# Altium PCB UWB_V1.PcbDoc
Units mm, origin at the board's own origin, x right, y up, seen from the top; angles counter-clockwise.
Board outline 45.34 x 49.88 mm, 2 copper layers (Top Layer, Bottom Layer); 57 components, 49 nets, 251 pads, 107 vias.
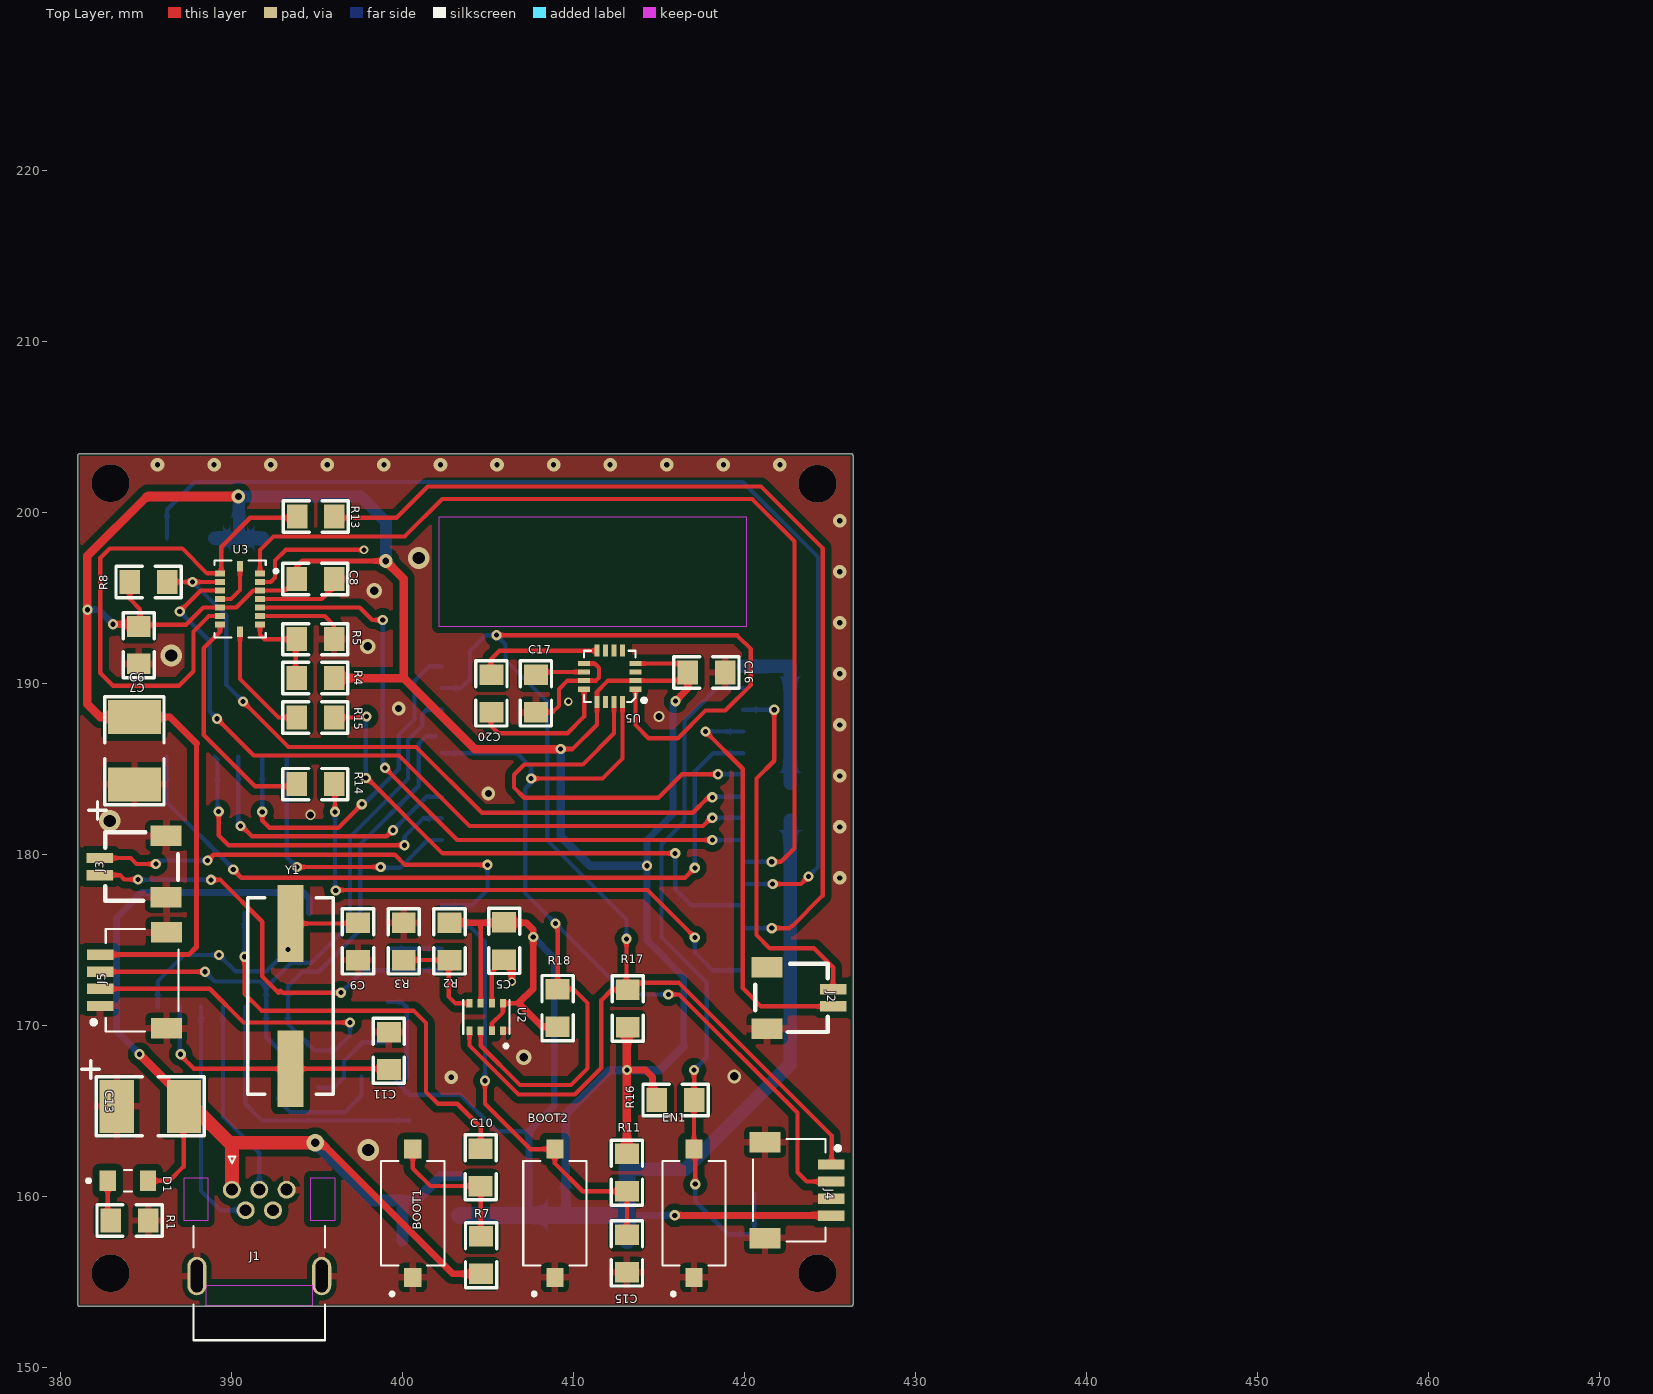
[diagram p0: Top Layer view]
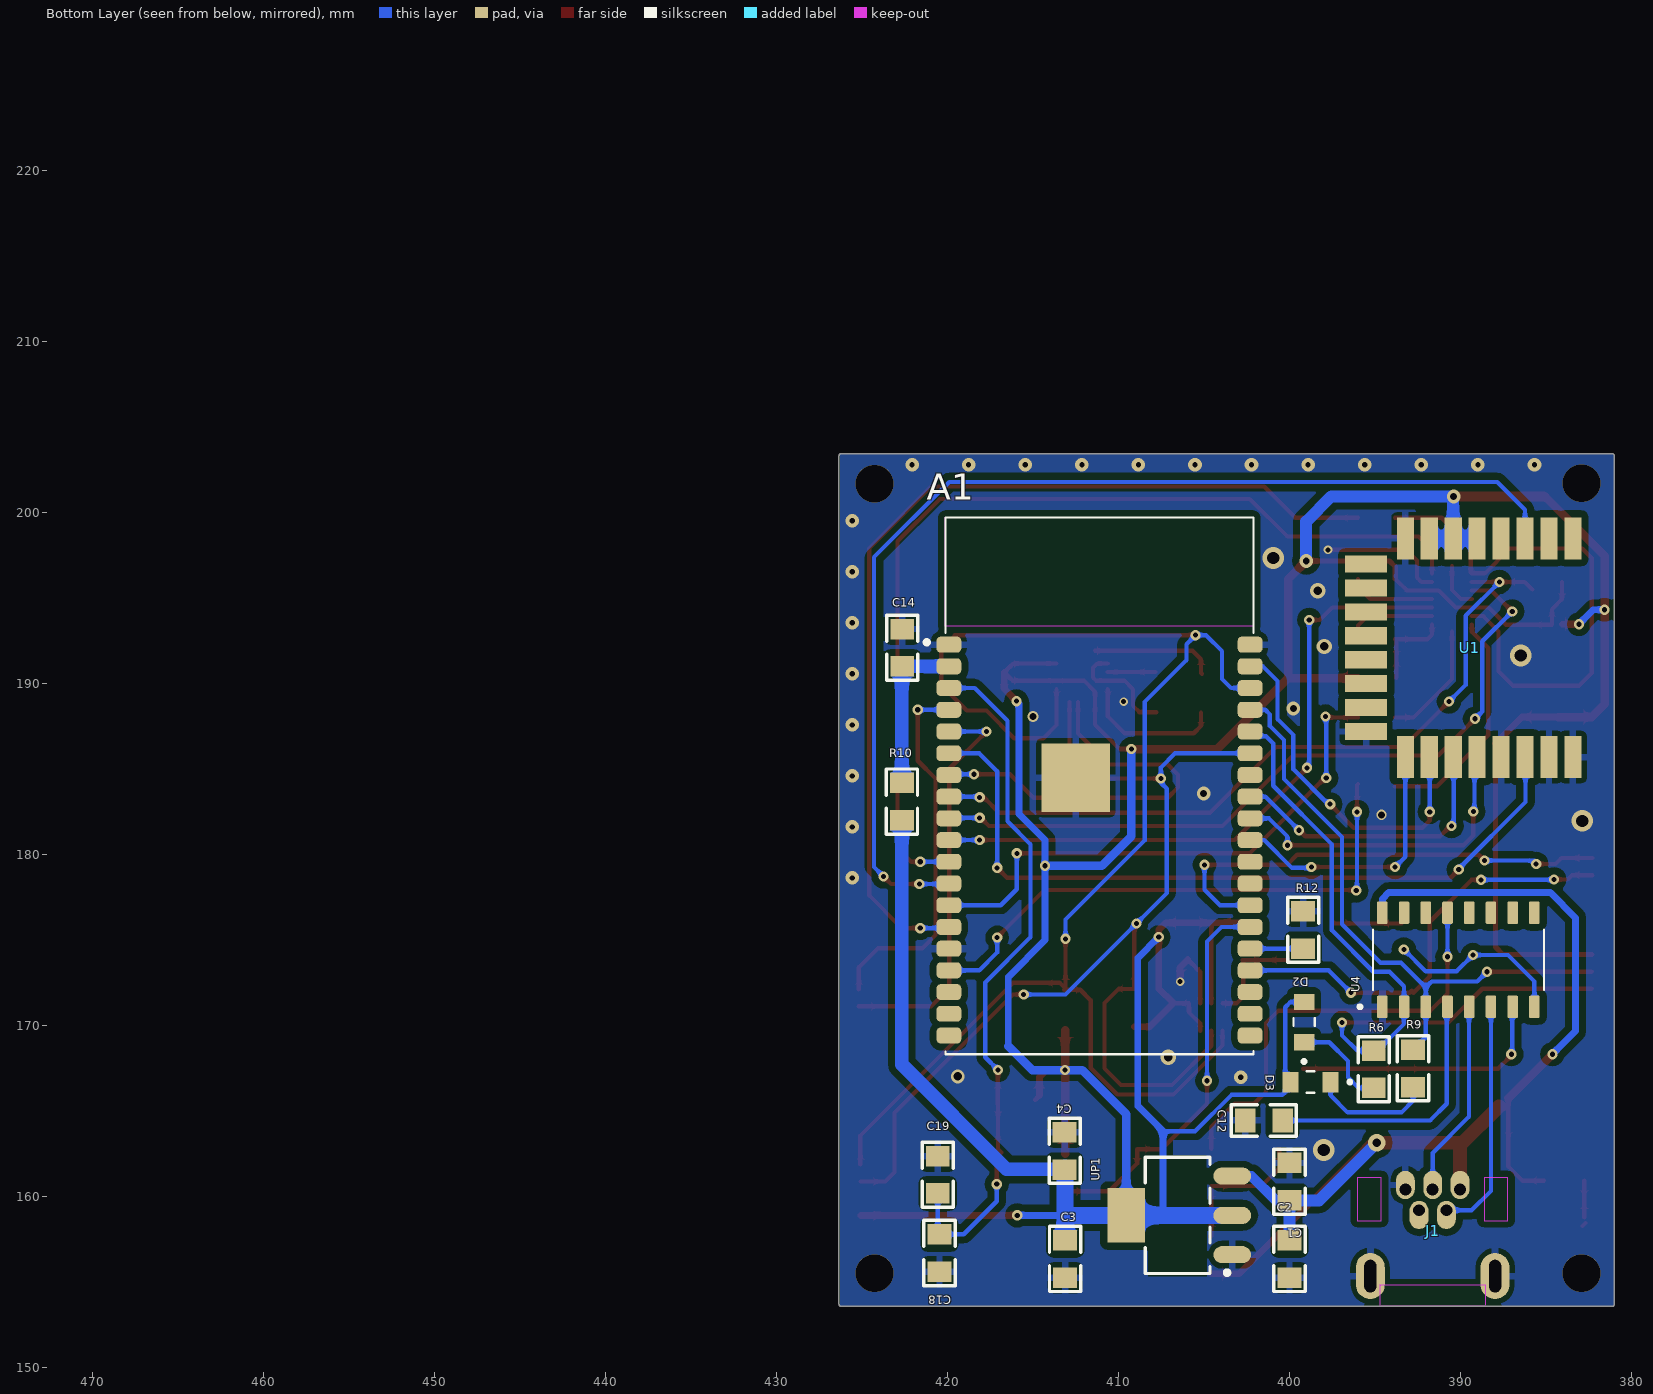
[diagram p1: Bottom Layer view, seen from below]
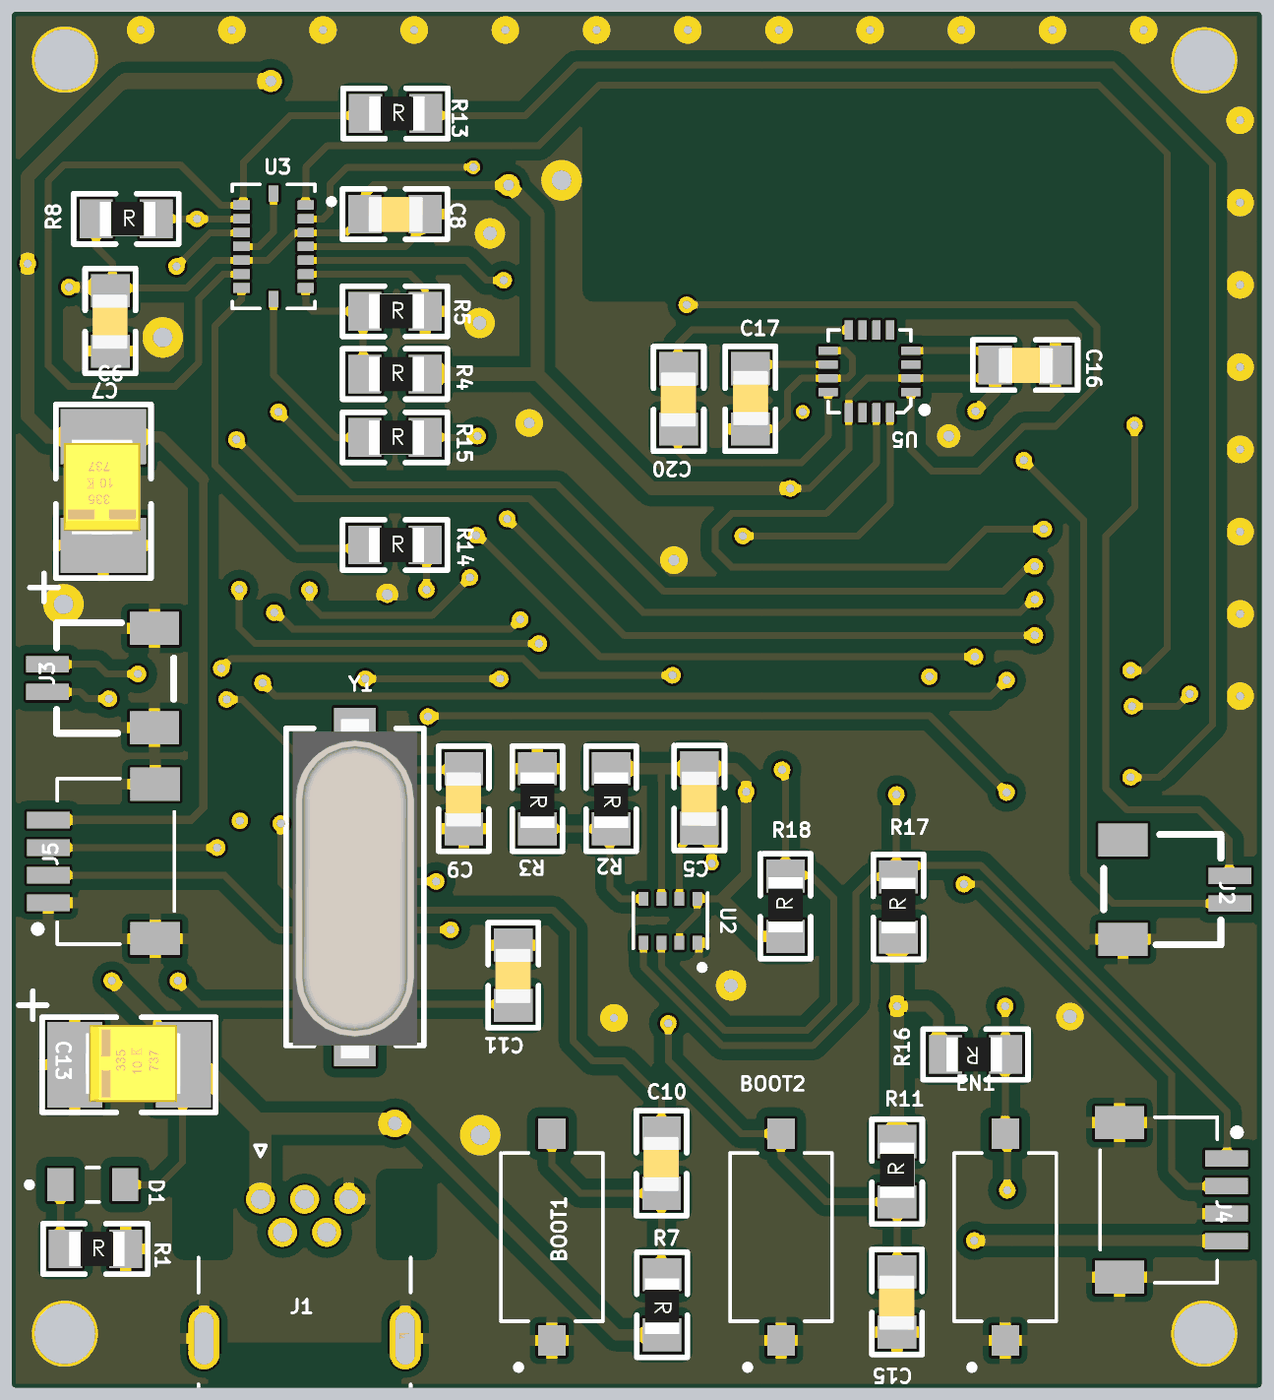
[diagram p2: 3D render of the assembled board from above, using the file's embedded part models]
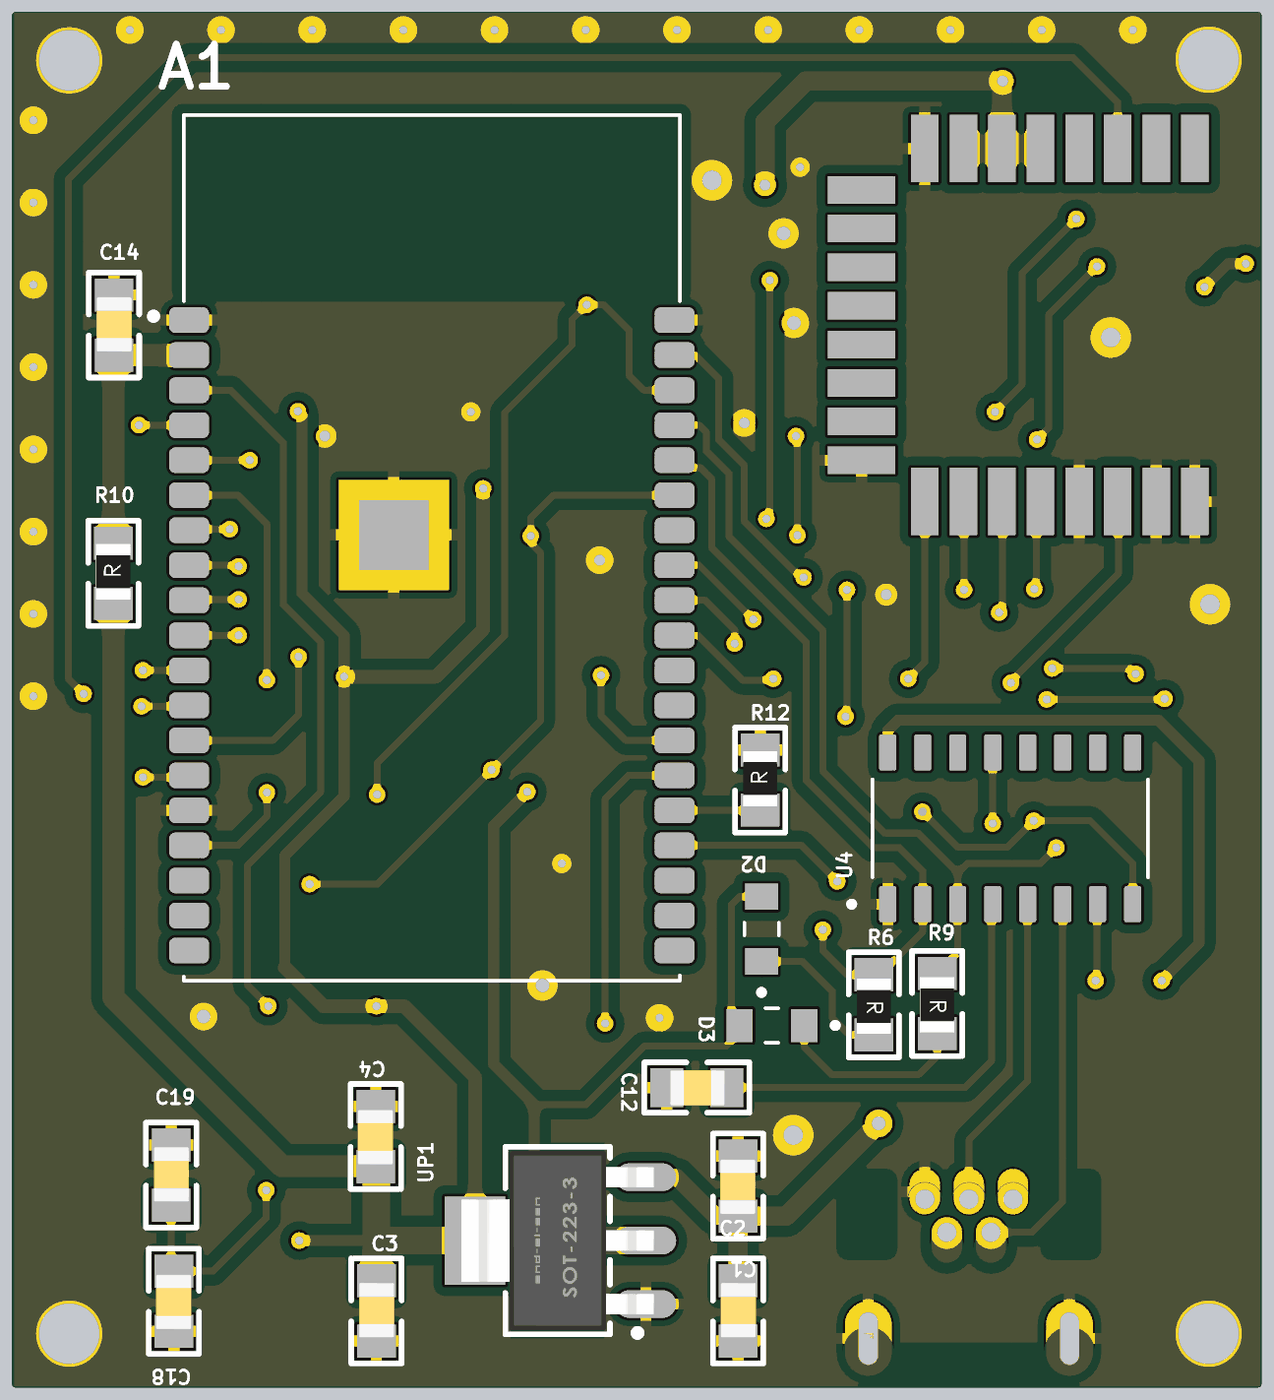
[diagram p3: 3D render of the assembled board from below, using the file's embedded part models]

## Layer stack, top to bottom
Top Solder: solder mask 0.0102, Solder Resist, Dk 3.5
Top Layer: signal copper 0.0356
Dielectric 1: dielectric 0.32, FR-4, Dk 4.8
Bottom Layer: signal copper 0.0356
Bottom Solder: solder mask 0.0102, Solder Resist, Dk 3.5

## Board outline
381.006,153.7 ccw(c381.132,153.7) 381.132,153.575 426.225,153.575 ccw(c426.225,153.7) 426.35,153.7 426.35,203.325 ccw(c426.225,203.325) 426.225,203.45 381.132,203.45 ccw(c381.132,203.325) 381.006,203.325

## Design rules (kind name [scope] priority, off if disabled: settings)
Clearance Clearance_polygon [InPolygon] p1: gap=0.4 ignorepadtopadclearanceinfootprint=FALSE
Clearance Clearance_all [All] p2: gap=0.2 ignorepadtopadclearanceinfootprint=FALSE
ComponentClearance [All] p1: gap=0.1 collisioncheckmode=3 verticalgap=0.1 showdistances=FALSE
FabricationTestPointUsage TestPointUsage [All] p1: valid=0 allowmultiple=FALSE
FabricationTestpoint Testpoint [All] p1: side=3 testpointundercomponent=TRUE minsize=1.016 maxsize=2.54 preferedsize=1.524 minholesize=0 maxholesize=1.016 preferedholesize=0.813 testpointgrid=0.025 allowsidetop=TRUE allowsidebottom=TRUE usegrid=TRUE gridtolerance=0
Height [All] p1: minheight=0 maxheight=100 prefheight=100
HoleSize [All] p1: absolutevalues=TRUE maxlimit=10 minlimit=0.3 maxpercent=80.000 minpercent=20.000
HoleToHoleClearance [All] p1: gap=0.3 allowstackedmicrovias=TRUE
MinimumSolderMaskSliver [All] p1: minsoldermaskwidth=0.1
PlaneClearance [All] p1: clearance=0.2
PlaneConnect [All] p1: planeconnectstyle=Relief reliefexpansion=0.5 reliefentries=4 reliefconductorwidth=0.5 reliefairgap=0.3
PolygonConnect PolygonConnect_via [All vs IsVia] p1: connectstyle=Direct reliefconductorwidth=0.254 reliefentries=4 polygonreliefangle="90 Angle" airgapwidth=0.254
PolygonConnect PolygonConnect_Pad [All vs IsPad] p2: connectstyle=Relief reliefconductorwidth=0.4 reliefentries=4 polygonreliefangle="90 Angle" airgapwidth=0.3
RoutingVias [All] p1: holewidth=0.3 width=0.6 viastyle="Through Hole" minholewidth=0.3 minwidth=0.5 maxholewidth=10 maxwidth=20
SilkToSilkClearance [All] p1: silktosilkclearance=0.1
SilkToSolderMaskClearance SilkscreenOverComponentPads [IsPad] p1: minsilkscreentomaskgap=0.01 clearancetoexposedcopper=TRUE
SolderMaskExpansion [All] p1: expansion=0.1 istentingtop=FALSE
Width [All] p1: maxlimit=20 minlimit=0.15 preferedwidth=0.25
19 further rules are at their usual default settings.

## Components (designator, comment, footprint, x,y, rotation, side; value= is the part's Value field where it differs from the comment)
A1 "ESP32-WROVER-I" XCVR_ESP32-WROVER-I 411.115,184.02 r180 bottom locked
BOOT1 "1437566-4" SW_TS09-63-25-R-160-SMT-TR 400.6,159.025 r90 top
BOOT2 "1437566-4" SW_TS09-63-25-R-160-SMT-TR 408.912,159.025 r90 top
C1 "Cap" C_805 399.975,160.9 r0 bottom value=100nf
C2 "Cap" C_805 400.026,156.325 r180 bottom value=22uf
C3 "Cap" C_805 413.151,156.325 r180 bottom value=22uf
C4 "Cap" C_805 413.125,162.7 r0 bottom value=100nf
C5 "100nF" C_805 405.975,174.975 r180 top
C6 "10uF" Tantalum_B 384.325,186.15 r0 top
C7 "100nF" C_805 384.6,192.275 r180 top
C8 "100nF" C_805 394.88,196.15 r270 top
C9 "22pF" C_805 397.425,174.95 r180 top
C10 "100nF" C_805 404.6,161.733 r180 top
C11 "22pF" C_805 399.225,168.55 r180 top
C12 "100nF" C_805 401.525,164.475 r270 bottom
C13 "10uF" Tantalum_B 385.325,165.275 r270 top
C14 "100nF" C_805 422.675,192.075 r180 bottom
C15 "0.1uF" C_805 413.15,156.7 r180 top
C16 "100nF" C_805 417.75,190.675 r270 top
C17 "4.7uF" C_805 407.775,189.4 r0 top
C18 "22uF" C_805 420.45,156.725 r0 bottom
C19 "0.1uF" C_805 420.6,161.25 r180 bottom
C20 "0.22uF" C_805 405.225,189.451 r180 top
D1 "LED SMD PACKAGE" "LED_V0805-SMD-R (Red)" 383.936,160.925 r0 top
D2 "LED SMD PACKAGE" "LED_V0805-SMD-R (Red)" 399.15,170.2 r90 bottom
D3 "LED SMD PACKAGE" "LED_V0805-SMD-R (Red)" 398.775,166.7 r0 bottom
EN1 "1437566-4" SW_TS09-63-25-R-160-SMT-TR 417.05,159.025 r90 top
J1 "54819-0519" MOLEX_54819-0519 390.025,160.4 r0 top locked
J2 "" SM02B-SRSS-TB(LF)(SN) 423.225,171.625 r270 top
J3 "" SM02B-SRSS-TB(LF)(SN) 384.275,179.3 r90 top
J4 "" JST_SM04B-SRSS-TB(LF)(SN) 425.075,160.375 r270 top
J5 "" JST_SM04B-SRSS-TB(LF)(SN) 382.325,172.65 r90 top
R1 "Resistor SMD 0603" R_805 384.011,158.625 r270 top value=1k
R2 "Resistor SMD 0603" R_805 402.775,174.95 r180 top value=0
R3 "Resistor SMD 0603" R_805 400.1,174.95 r180 top value=0
R4 "Resistor SMD 0603" R_805 394.88,190.35 r270 top value=1k
R5 "Resistor SMD 0603" R_805 394.88,192.625 r270 top value=1k
R6 "Resistor SMD 0603" R_805 395.05,167.475 r0 bottom value=1k
R7 "Resistor SMD 0603" R_805 404.625,156.6 r180 top value=10k
R8 "Resistor SMD 0603" R_805 385.125,195.975 r270 top value=4.7k
R9 "Resistor SMD 0603" R_805 392.75,167.525 r0 bottom value=1k
R10 "Resistor SMD 0603" R_805 422.7,183.075 r180 bottom value=0
R11 "Resistor SMD 0603" R_805 413.1,161.375 r0 top value=1k
R12 "Resistor SMD 0603" R_805 399.225,175.575 r180 bottom value=4.7k
R13 "Resistor SMD 0603" R_805 394.9,199.8 r270 top value=220
R14 "Resistor SMD 0603" R_805 394.88,184.15 r270 top value=220
R15 "Resistor SMD 0603" R_805 394.88,188.05 r270 top value=220
R16 "Resistor SMD 0603" R_805 416,165.625 r90 top value=10k
R17 "Resistor SMD 0603" R_805 413.15,170.975 r0 top value=4.7k
R18 "Resistor SMD 0603" R_805 409.05,171 r0 top value=4.7k
U1 "DWM1000" XCVR_DWM1000 385.225,192.1 r270 bottom locked
U2 "BMP280" XDCR_BMP280 404.9,170.5 r270 top
U3 "BMI088" PQFN50P450X300X100-16N 390.5,194.95 r270 top
U4 "CH340G" SOIC127P600X180-16N 390.125,173.85 r90 bottom locked
U5 "HMC5883L" PLCC16-0.5-3X3MM 413.625,191.925 r180 top
UP1 "LM1117IMP-3V3" SOT223_4 406.55,158.9 r0 bottom
Y1 "12 MHz" "Crystal SMD" 393.45,171.725 r90 top locked

## Footprints (in the part's own frame and the unit in brackets; to place one, negate y for a bottom-side part, rotate by r counter-clockwise, add the part's x,y. Pads: shape width x height; smd on the part's side, far side on the other; paste and mask are expansions set on the pad)
C_805 [mm]
  rect 1.4x1.2 smd: 1(0.025,1.118) 2(0.025,-1.067)
  silkscreen extent -0.89,-1.88 0.94,1.93, body extent -0.61,-0.95 0.69,1.05, height 1.1
"Crystal SMD" [mm] "DESIGNER ABBAS BASEREH"
  rect 4.5x1.5 smd: 1(-4.25,0) 2(4.25,0)
  silkscreen extent -5.75,-2.5 5.75,2.5, body extent -6.21,-2.25 6.09,2.25, height 5.18
JST_SM04B-SRSS-TB(LF)(SN) [mm]
  rect 0.6x1.55 smd: 1(-1.5,0) 2(-0.5,0) 3(0.5,0) 4(1.5,0)
  rect 1.2x1.8 smd: S1(-2.8,-3.875) S2(2.8,-3.875)
  silkscreen extent -3,-4.57 3,0.49
"LED_V0805-SMD-R (Red)" [mm]
  rect 0.95x1.2 smd: 1(-1.175,0) 2(1.175,0)
  silkscreen extent -2.4,-0.63 0.23,0.63
MOLEX_54819-0519 [mm]
  oval 1.1x1.65 smd far side paste-2 mask+0: 1(0,0.275) 2(0.8,-1.475) 3(1.6,0.275) 4(2.4,-1.475) 5(3.2,0.275)
  round 1.05 hole 0.7 mask+0.076: 6(0,0) 7(0.8,-1.2) 8(1.6,0) 9(2.4,-1.2) 10(3.2,0)
  oval 1.122x2.245 hole 0.7 slot 1.9 at 90 deg mask+0: 11(-2.05,-5.05) 12(5.25,-5.05)
  oval 1.7x2.7 smd far side paste-2 mask+0: S1(-2.05,-5.05) S2(5.25,-5.05)
  Keep-Out Layer region: 4.7,-6.8 -1.5,-6.8 -1.5,-5.6 4.7,-5.6
  Keep-Out Layer region: -1.4,-1.8 -2.8,-1.8 -2.8,0.7 -1.4,0.7
  Keep-Out Layer region: 6,-1.8 4.6,-1.8 4.6,0.7 6,0.7
  Keep-Out Layer region: -1.4,-1.8 -2.8,-1.8 -2.8,0.7 -1.4,0.7
  Keep-Out Layer region: 6,-1.8 4.6,-1.8 4.6,0.7 6,0.7
  Keep-Out Layer region: 4.7,-6.8 -1.5,-6.8 -1.5,-5.6 4.7,-5.6
  silkscreen extent -2.25,-8.8 5.45,1.95
PLCC16-0.5-3X3MM [mm]
  rect 0.7x0.3 smd: 1(0,2.25) 2(0,1.75) 3(0,1.25) 4(0,0.75) 9(3,0.75) 10(3,1.25) 11(3,1.75) 12(3,2.25)
  rect 0.3x0.7 smd: 5(0.75,0) 6(1.25,0) 7(1.75,0) 8(2.25,0) 13(2.25,3) 14(1.75,3) 15(1.25,3) 16(0.75,3)
  silkscreen extent -0.6,0 3,3
PQFN50P450X300X100-16N [mm]
  rect 0.35x0.59 smd: 1(-1.5,1.165) 2(-1,1.165) 3(-0.5,1.165) 4(0,1.165) 5(0.5,1.165) 6(1,1.165) 7(1.5,1.165) 9(1.5,-1.165) 10(1,-1.165) 11(0.5,-1.165) 12(0,-1.165) 13(-0.5,-1.165) 14(-1,-1.165) 15(-1.5,-1.165)
  rect 0.59x0.35 smd: 8(1.915,0) 16(-1.915,0)
  silkscreen extent -2.25,-1.5 2.25,2.2
R_805 [mm]
  rect 1.4x1.2 smd: 1(0.025,1.118) 2(0.025,-1.067)
  silkscreen extent -0.89,-1.88 0.94,1.93, body extent -0.6,-0.93 0.65,1.08, height 0.51
SM02B-SRSS-TB(LF)(SN) [mm]
  rect 0.6x1.55 smd: 1(-0.5,1.975) 2(0.5,1.975)
  rect 1.2x1.8 smd: 3(-1.8,-1.9) 4(1.8,-1.9)
  silkscreen extent -2,-2.6 2,1.65
SOIC127P600X180-16N [mm]
  rrect25% 1.31x0.62 smd: 1(-2.75,4.445) 2(-2.75,3.175) 3(-2.75,1.905) 4(-2.75,0.635) 5(-2.75,-0.635) 6(-2.75,-1.905) 7(-2.75,-3.175) 8(-2.75,-4.445) 9(2.75,-4.445) 10(2.75,-3.175) 11(2.75,-1.905) 12(2.75,-0.635) 13(2.75,0.635) 14(2.75,1.905) 15(2.75,3.175) 16(2.75,4.445)
  silkscreen extent -2.85,-5 1.78,5.85
SOT223_4 [mm] "SOT223, 4-Leads, Body 6.5x3.5mm, Pitch 2.30mm-Designer Abbas Basereh"
  oval 2.2x1 smd: 1(-3.2,2.3) 2(-3.2,0) 3(-3.2,-2.3)
  rect 2.2x3.2 smd: 4(3,0)
  Top Layer pour cut-out: -1.7,3.556 1.7,3.556 1.7,-3.556 -1.7,-3.556
  silkscreen extent -3.02,-3.4 1.9,3.47, body extent -3.5,-3.25 3.5,3.25, height 1.7
SW_TS09-63-25-R-160-SMT-TR [mm]
  rect 1.1x1 smd: 1(-3.75,0) 2(3.75,0)
  silkscreen extent -4.82,-1.85 3.05,1.85
Tantalum_B [mm]
  rect 3.1x2 smd: 1(-0.002,-2.041) 2(-0.002,1.896)
  silkscreen extent -2.67,-4.07 1.73,3.07, body extent -1.45,-1.65 1.35,1.81, height 1.94
XCVR_DWM1000 [mm]
  rect 2.45x1 smd: 1(-6.4,1.8) 2(-6.4,0.4) 3(-6.4,-1) 4(-6.4,-2.4) 5(-6.4,-3.8) 6(-6.4,-5.2) 7(-6.4,-6.6) 8(-6.4,-8) 17(6.4,-8) 18(6.4,-6.6) 19(6.4,-5.2) 20(6.4,-3.8) 21(6.4,-2.4) 22(6.4,-1) 23(6.4,0.4) 24(6.4,1.8)
  rect 1x2.45 smd: 9(-4.9,-10.295) 10(-3.5,-10.295) 11(-2.1,-10.295) 12(-0.7,-10.295) 13(0.7,-10.295) 14(2.1,-10.295) 15(3.5,-10.295) 16(4.9,-10.295)
XCVR_ESP32-WROVER-I [mm]
  rrect50% 1.45x0.93 smd: 1(-8.81,8.26) 2(-8.81,6.99) 3(-8.81,5.72) 4(-8.81,4.45) 5(-8.81,3.18) 6(-8.81,1.91) 7(-8.81,0.64) 8(-8.81,-0.63) 9(-8.81,-1.9) 10(-8.81,-3.17) 11(-8.81,-4.44) 12(-8.81,-5.71) 13(-8.81,-6.98) 14(-8.81,-8.25) 15(-8.81,-9.52) 16(-8.81,-10.79) 17(-8.81,-12.06) 18(-8.81,-13.33) 19(-8.81,-14.6) 20(8.81,-14.6) 21(8.81,-13.33) 22(8.81,-12.06) 23(8.81,-10.79) 24(8.81,-9.52) 25(8.81,-8.25) 26(8.81,-6.98) 27(8.81,-5.71) 28(8.81,-4.44) 29(8.81,-3.17) 30(8.81,-1.9) 31(8.81,-0.63) 32(8.81,0.64) 33(8.81,1.91) 34(8.81,3.18) 35(8.81,4.45) 36(8.81,5.72) 37(8.81,6.99) 38(8.81,8.26)
  rect 4x4 smd paste-3: 39(-1.38,0.47)
  Keep-Out Layer region: 9,9.33 -9.029,9.33 -9.029,15.7 9,15.7
  Keep-Out Layer region: 9,9.331 -9.03,9.331 -9.03,15.7 9,15.7
  silkscreen extent -10.22,-15.7 9,15.7
XDCR_BMP280 [mm]
  rect 0.5x0.35 smd: 1(0.8,0.975) 2(0.8,0.325) 3(0.8,-0.325) 4(0.8,-0.975) 5(-0.8,-0.975) 6(-0.8,-0.325) 7(-0.8,0.325) 8(-0.8,0.975)
  silkscreen extent -1,-1.35 1.79,1.35

## Part data
A1: "Module: combo; GPIO, I2C x2, I2S x2, SDIO, SPI x3, UART x3; U.FL", Package=None, Availability=Unavailable, MP=ESP32-WROVER-I, Price=None
BOOT1 BOOT2 EN1: "Switch Tactile OFF _ON_ SPST Rectangular Button Gull Wing 0.05A 12VDC 1.77N SMD T/R", Contact_Current_Rating="50 mA", Package=None, Configuration_Pole-Throw="Single Pole - Single Throw", Digi-Key_Part_Number=450-1758-1-ND, Digi-Key_Purchase_URL=https://www.digikey.com/product-detail/en/te-connectivity-alcoswitch-switches/FSMSMTR/450-1758-1-ND/2271637?utm_source=snapeda&utm_medium=aggregator&utm_campaign=symbol, MF="TE Connectivity", MP=FSMSMTR, SnapEDA_Link=https://www.snapeda.com/parts/FSMSMTR/TE%20Connectivity%20ALCOSWITCH%20Switches/view-part/2118497/?ref=snap, TE_purchase_URL=https://www.te.com/usa-en/product-1437566-4.html?te_bu=Cor&te_type=disp&te_campaign=seda_glo_cor-seda-global-disp-prtnr-fy19-seda-model-bom-cta_sma-317_1&elqCampaignId=32493
C1 C2 C3 C4: library part Cap_1
C5 C6 C7 C8 C9 C10 C11 C12 C13 C14 C15 C16 C17 C18 C19 C20: library part "CAP SMD 0805", "CAP 0805", Data=16-12-2016, Desc.="CAP SMD 0805", Designer="Abbas Basereh"
D1 D2 D3: "SMD Mono-color Chip LED Waterclear", Forward Voltage="3.2 V", Part Number=150080BS75000, Peak Wavelength="465 nm", Published Date="Jan 2017", Publisher="Ali Hafizi"
J1: "USB - mini B USB 2.0 OTG Receptacle Connector 5 Position Through Hole, Right Angle", Package=None, Availability=Good, Check_prices=https://www.snapeda.com/parts/54819-0519/Molex/view-part/13744/?ref=eda, MF=Molex, MP=54819-0519, Price=None, Purchase-URL=https://pricing.snapeda.com/search/part/54819-0519/?ref=eda, SnapEDA_Link=https://www.snapeda.com/parts/54819-0519/Molex/view-part/13744/?ref=snap
J2 J3: library part SM02B-SRSS-TB(LF)(SN), "Connector Header Surface Mount, Right Angle 2 position 0.039 _1.00mm_", Package=None, Availability=Unavailable, MF="JST Sales", MP=SM02B-SRSS-TB_LF__SN_, Price=None, SnapEDA_Link=https://www.snapeda.com/parts/SM02B-SRSS-TB%28LF%29%28SN%29/JST%20Sales%20America%20Inc./view-part/447499/?ref=snap
J4 J5: library part SM04B-SRSS-TB(LF)(SN), "Connector Header Surface Mount, Right Angle 4 position 0.039 _1.00mm_", Package=None, Availability=Unavailable, MF="JST Sales", MP=SM04B-SRSS-TB_LF__SN_, Price=None, SnapEDA_Link=https://www.snapeda.com/parts/SM04B-SRSS-TB%28LF%29%28SN%29/JST%20Sales%20America%20Inc./view-part/557466/?ref=snap
U1: "802.15.4 IR-UWB Transceiver Module 3.5GHz ~ 6.5GHz Integrated, Chip Surface Mount", Package="Module Decawave", Availability=Unavailable, MF="Decawave Limited", MP=DWM1000, Price=None, SnapEDA_Link=https://www.snapeda.com/parts/DWM1000/Decawave%20Limited/view-part/327593/?ref=snap
U2: "BMP280 Absolute Barometric Pressure Sensor for Battery Powered Devices 2 x 2.5mm", Package=None, Availability=Unavailable, MP=BMP280, Price=None
U3: "Accelerometer, Gyroscope, 6 Axis Sensor IÂ²C, SPI Output", Package="VFLGA-16 Bosch Sensortec", Availability="In Stock", Check_prices=https://www.snapeda.com/parts/BMI088/Bosch%20Sensortec/view-part/2774026/?ref=eda, MF="Bosch Sensortec", MP=BMI088, Price=None, Purchase-URL=https://pricing.snapeda.com/search/part/BMI088/?ref=eda, SnapEDA_Link=https://www.snapeda.com/parts/BMI088/Bosch%20Sensortec/view-part/2774026/?ref=snap
U4: Package=None, Availability=Unavailable, MP=CH340G, Price=None
U5: library part MAGNETIC-HMC5883L(PLCC16), "HMC5883L HMC Magnetic, Digital Compass Sensor Evaluation Board", Package="LCC-16 Honeywell", Availability=Unavailable, Check_prices=https://www.snapeda.com/parts/HMC5883L/Honeywell%20Aerospace/view-part/106081/?ref=eda, MF="Honeywell Aerospace", MP=HMC5883L, Price=None, SnapEDA_Link=https://www.snapeda.com/parts/HMC5883L/Honeywell%20Aerospace/view-part/106081/?ref=snap
UP1: library part LM1117IMP-x.x, "x.x Volt, 800mA Low-Dropout Linear Regulator, 4-pin SOT-223", Data=16-12-2016, Designer="Abbas Basereh"
Y1: library part XTAL_Crystal, "XTAL Crystal", ComponentLink1Description=Datasheet, ComponentLink2Description=Reference, Design Date=2017-1-3, Designer="ABBAS BASEREH", Mounting Technology="Surface Mount\Through-Hole", Status=Unreleased
R1 R2 R3 R4 R5 R6 R7 R8 R9 R10 R11 R12 R13 R14 R15 R16 R17 R18: ComponentLink1Description="Website: Tarahiboard", ComponentLink1URL=https://www.tarahiboard.com/, ComponentLink2Description=Telegram, ComponentLink2URL=https://t.me/tarahiboard, ComponentLink3Description=Instagram, ComponentLink3URL=https://instagram.com/tarahiboard, DatasheetVersion=2021

## Free pads (board coordinates)
  round 2.2 hole 2.2: 3(382.925,155.525) 3(382.925,201.725) 3(424.275,155.525) 3(424.275,201.7)

## Via types
v1: diameter 0.6, hole 0.3, Top Layer to Bottom Layer, 61 vias
v2: diameter 0.8, hole 0.3, Top Layer to Bottom Layer, 21 vias
v3: diameter 2.2, hole 2.2, Top Layer to Bottom Layer, 7 vias
v4: diameter 1.27, hole 0.711, Top Layer to Bottom Layer, 4 vias
v5: diameter 0.8, hole 0.4, Top Layer to Bottom Layer, 4 vias
v6: diameter 0.5, hole 0.3, Top Layer to Bottom Layer, 3 vias
v7: diameter 0.9, hole 0.5, Top Layer to Bottom Layer, 3 vias
v8: diameter 0.6, hole 0.4, Top Layer to Bottom Layer, 1 vias
v9: diameter 0.8, hole 0.5, Top Layer to Bottom Layer, 1 vias
v10: diameter 0.65, hole 0.4, Top Layer to Bottom Layer, 1 vias
v11: diameter 1, hole 0.5, Top Layer to Bottom Layer, 1 vias

## Nets (pads, with @x,y where several pads share a name; then routed paths per layer and width w, separated by ;. In a path a pad name is that pad's centre, name@x,y a point inside that pad or via, vN(x,y) a via of type N, cw(c..) or ccw(c..) an arc to the next point about the centre after c; other vN are vias at no path point)
3V3: C3.1 C4.1 C5.2 C6.2 C7.2 C8.2 C16.2 D2.2 D3.2 J4.4 J5.4 R2.2 R4.1 R8.2 R10.2 R11.1 R16.1 R17.2 R18.2 U1.5 U1.6 U1.7 U2.2 U2.6 U2.8 U3.3 U3.11 U5.2 U5.4 U5.13 UP1.2 UP1.4 | length 282.5
  Top Layer w0.25: C7.2@384.025,193.475 C7.2@384.058,193.442 ; R8.2 384.058,194.942 384.65,194.35 384.65,193.442 387.342,193.442 388.35,194.45 U3.11 390.275,194.45 391.275,195.45 U3.3 393.138,195.45 C8.2 ; U2.6 404.575,176.017 ; U2.2 405.225,170.125 405.875,170.775 U2.8 406.775,171.3 ; v1(409.25,186.175) 409.95,186.175 411.375,187.6 U5.13 411.375,189.525 412.025,190.175 U5.2 416.209,190.175 C16.2 416.158,191.175 U5.4 ; R16.1@414.625,165.908 R16.1
  Top Layer w0.3: J5.4 387.5,174.15 387.95,174.6 387.95,186.5 ; C8.2 393.813,196.838 394.15,197.175 v5(399.025,197.175)
  Top Layer w0.4: v1(383.075,193.475) C7.2@384.025,193.475 ; C6.2 386.404,188.046 387.95,186.5 ; R2.2 404.575,176.017 407.233,176.017 407.65,175.6 v1(407.65,175.175) 407.65,172.175 406.787,171.312 408.167,169.933 R18.2 ; v1(413.125,167.4) 414.225,167.4 414.625,167 R16.1@414.625,165.908 ; v1(415.925,158.9) J4.4@425.075,158.9 ; v1(415.975,188.975) 416.683,189.683 C16.2
  Top Layer w0.5: C6.2 382.329,188.046 381.575,188.8 v1(381.575,194.325) 381.575,197.475 385.025,200.925 385.075,200.875 385.15,200.95 ; R4.1 400.075,190.325 ; v5(399.025,197.175) 400.075,196.125 400.075,190.325 ; v1(409.25,186.175) 404.225,186.175 400.075,190.325 ; R11.1 v1(413.125,167.4) R17.2@413.125,169.725
  Top Layer w0.6: 385.15,200.95 v5(390.4,200.95)
  Bottom Layer w0.25: D2.2 399.95,171.375 400.25,171.075 400.25,167 D3.2 ; D3.2@399.655,166.72 400.425,165.95 403.4,165.95 405.525,163.825 407.4,163.825 ; 407.4,158.95 407.45,158.9 ; 413.05,158.9 413.125,158.9 ; C4.1 C4.1@413.168,161.6 ; v1(414.3,179.35) v1@414.3,179.45
  Bottom Layer w0.4: v1(381.575,194.325) 382.225,194.325 v1(383.075,193.475) ; 407.4,158.95 407.4,163.825 408.875,165.3 408.875,173.95 v1(407.65,175.175) ; 413.125,158.9 v1(415.925,158.9) ; v1(414.3,179.35) 414.3,175 416.45,172.85 416.45,168.8 ; v1@414.3,179.45 414.3,180.85 415.825,182.375 415.825,188.825 v1(415.975,188.975)
  Bottom Layer w0.5: v1(409.25,186.175) 409.25,181.075 410.975,179.35 v1(414.3,179.35) ; UP1.4 409.55,164.825 412.125,167.4 v1(413.125,167.4) 415.05,167.4 416.45,168.8
  Bottom Layer w0.7: U1.6 390.425,200.95 397.55,200.95 399.025,199.475 v5(399.025,197.175)
  Bottom Layer w0.8: U1.5 U1.6 U1.7 ; C4.1@413.168,161.6 416.55,161.6 422.675,167.725 R10.2
  Bottom Layer w1: UP1.2 407.45,158.9 UP1.4 413.05,158.9 ; C3.1 413.125,158.9 C4.1@413.125,161.675
5V: C1.1 C2.1 C13.2 D1.2 J1.1 J1.6 R7.1 U4.16 UP1.3 | length 68.6
  Top Layer w0.25: D1.2 386.375,160.925 387.2,161.75 C13.2@387.2,165.277 ; C13.2@387.2,165.75 C13.2@387.2,165.277 ; C13.2@387.748,165.277 C13.2 C13.2@387.2,165.277
  Top Layer w0.4: v11(394.9,163.15) 395.275,163.15 402.943,155.482 R7.1
  Top Layer w0.5: v1(384.625,168.325) C13.2@387.2,165.75
  Top Layer w0.8: C13.2@387.748,165.277 390.025,163 J1.6 ; 390.025,163.15 v11(394.9,163.15)
  Bottom Layer w0.25: J1.6 J1.1
  Bottom Layer w0.4: v1(384.625,168.325) 383.275,169.675 383.275,176.3 384.75,177.775 394.2,177.775 394.57,177.405 U4.16
  Bottom Layer w0.6: C1.1 400.807,159.782 402.225,161.2 UP1.3
  Bottom Layer w0.7: v11(394.9,163.15) 398.268,159.782 C1.1 C2.1
ACCEL_INT: A1.11 U3.1 | length 56.2
  Top Layer w0.25: U3.1 391.665,197.815 392.45,198.6 400.125,198.6 402.325,200.8 420.45,200.8 422.925,198.325 422.925,180.375 422.13,179.58 v1(421.6,179.58)
  Bottom Layer w0.25: A1.11 v1(421.6,179.58)
BOOT: A1.25 BOOT2.2 C15.2 R11.2 | length 25.8
  Top Layer w0.25: v1(404.825,166.775) 404.825,165.425 407.475,162.775 BOOT2.2 408.912,161.937 410.542,160.308 R11.2 C15.2@413.125,157.768
  Bottom Layer w0.25: A1.25 403.98,175.77 404.825,174.925 v1(404.825,166.775)
BUS_SCL: A1.36 J4.1 R17.1 U2.4 U5.1 | length 90.8
  Top Layer w0.25: U2.4 403.925,168.839 406.789,165.975 410.075,165.975 411.625,167.525 411.625,171.475 412.243,172.093 R17.1 R17.1@413.1,172.168 ; v1(405.495,192.834) 419.584,192.834 419.575,192.825 420.375,192.025 420.375,189.925 418.875,188.425 417.725,188.425 416.1,186.8 414.4,186.8 413.625,187.575 U5.1 ; v1(413.1,175.075) R17.1@413.1,172.168 ; J4.1@425.1,161.875 425.1,163.575 416.175,172.5 413.432,172.5 R17.1@413.1,172.168
  Bottom Layer w0.25: A1.36 403.415,189.74 403.95,190.275 403.95,191.9 404.884,192.834 v1(405.495,192.834) 406.025,192.304 406.025,191.375 408.475,188.925 408.475,180.825 413.1,176.2 v1(413.1,175.075)
BUS_SDA: A1.33 J4.2 R18.1 U2.3 U5.16 | length 67.4
  Top Layer w0.25: U2.3 404.575,168.825 406.875,166.525 409.85,166.525 410.825,167.5 410.825,171.325 410.007,172.143 409.075,172.143 409.075,175.85 v1(408.95,175.975) ; v1(407.525,184.45) 411.7,184.45 412.875,185.625 U5.16 ; v1(415.55,171.825) 416.175,171.825 423.1,164.9 423.1,161.425 423.65,160.875 J4.2
  Bottom Layer w0.25: A1.33 406.695,185.93 407.525,185.1 v1(407.525,184.45) 407.525,184.2 407.175,183.85 407.175,177.75 v1(408.95,175.975) 413.1,171.825 v1(415.55,171.825)
CH_RESET: C10.2 U4.13 | length 25.4
  Top Layer w0.25: v1(390.76,174.025) 390.76,171.865 391.75,170.875 400.65,170.875 401.375,170.15 401.375,166.125 402.075,165.425 403.2,165.425 404.575,164.05 C10.2
  Bottom Layer w0.25: v1(390.76,174.025) U4.13
CS_ACC: A1.8 R8.1 U3.14 | length 44
  Top Layer w0.25: R8.1@385.8,195.507 R8.1 v1(387.725,195.95) U3.14 ; v1(390.675,188.95) 393.325,186.3 400.8,186.3 404.65,182.45 416.975,182.45 v1@417.875,183.35
  Bottom Layer w0.25: v1(387.725,195.95) 389.7,193.975 389.7,189.925 v1(390.675,188.95) ; v1@418.125,183.39 A1.8
  other v1: 418.125,183.35
CS_GYR: A1.10 U3.5 | length 38.9
  Top Layer w0.25: U3.5 397.506,194.45 398.231,193.725 v1(398.85,193.725) ; v1(398.975,185.075) 403.2,180.85 v1(418.125,180.85)
  Bottom Layer w0.25: v1(398.85,193.725) 398.85,185.2 v1(398.975,185.075) ; v1(418.125,180.85) A1.10
CS_UWB: A1.29 U1.17 | length 15.9
  Top Layer w0.25: v1(393.825,179.275) v1(398.725,179.275)
  Bottom Layer w0.25: U1.17 393.225,179.875 v1(393.825,179.275) ; v1@398.725,179.375 398.875,179.225 399.85,179.225 401.475,180.85 A1.29
D+: J1.3 J1.8 U4.5 | length 11.6
  Bottom Layer w0.25: U4.5@389.5,171.1 389.5,164.675 391.625,162.55 J1.3 J1.8
D-: J1.2 J1.7 U4.6 | length 13.8
  Bottom Layer w0.25: U4.6 388.22,160.33 389.35,159.2 J1.7
EN: A1.3 C18.2 C19.2 EN1.2 R16.2 | length 41.1
  Top Layer w0.25: v1(417.05,167.4) 417.058,167.392 417.058,165.4 417.05,165.391 EN1.2 416.85,162.575 417.125,162.3 v1(417.125,160.725)
  Bottom Layer w0.25: v1(417.05,167.4) 417.8,168.15 417.8,172.525 415.15,175.175 415.15,180.6 416.5,181.95 416.5,187.825 418.415,189.74 A1.3 ; v1(417.125,160.725) 417.125,159.725 419.058,157.792 C18.2 420.575,157.891 C19.2
GND: A1.1 A1.15 A1.38 A1.39 BOOT1.1 BOOT2.1 C1.2 C2.2 C3.2 C4.2 C5.1 C6.1 C7.1 C8.1 C9.1 C11.2 C12.2 C13.1 C14.1 C15.1 C16.1 C17.2 C18.1 C19.1 EN1.1 J1.5 J1.10 J1.11 J1.12 J1.S1 J1.S2 J2.4 J3.3 J3.4 J4.3 J4.S1 J4.S2 J5.1 J5.S1 J5.S2 pad.3 R1.1 R3.2 R5.1 R12.1 U1.8 U1.16 U1.21 U1.23 U1.24 U2.1 U2.7 U3.2 U3.4 U3.6 U4.1 U5.9 U5.11 UP1.1 | length 28.9
  Top Layer w0.25: U3.6 395.45,193.95 395.997,193.403 R5.1 ; U3.4 395.275,194.95 395.997,195.672 C8.1 ; U3.2 392.3,195.95 392.55,196.2 392.55,197.2 393.175,197.825 v6(397.75,197.825) ; U2.7 405.225,173.133 C5.1 ; C17.2 408.783,188.333 409.15,188.7 409.15,189.675 409.65,190.175 U5.11 411.325,190.175 411.5,190.35 411.5,190.925 411.25,191.175 U5.9
  Top Layer w0.4: C5.1 406.4,173.407 v6(406.4,172.575)
  other v2: 402.85,166.975 425.575,178.642 425.575,181.625 425.575,184.608 425.575,187.592 425.575,190.575 425.575,193.558 425.575,196.542 425.575,199.525 385.675,202.8 388.984,202.8 392.293,202.8 395.602,202.8 398.911,202.8 402.22,202.8 405.53,202.8 408.839,202.8 412.148,202.8 415.457,202.8 418.766,202.8 422.075,202.8
  other v3: 382.925,155.525 382.925,155.525 424.275,155.525 424.275,201.7 424.275,201.7 382.925,201.725 382.925,201.725
  other v4: 398,162.725 382.875,181.975 386.475,191.65 400.95,197.35
  other v5: 405.025,183.575 399.775,188.55
  other v6: 409.7,188.95
  other v7: 407.1,168.15 397.975,192.175 398.35,195.425
  other v8: 394.625,182.325
  other v9: 419.4,167.025
  other v10: 415,188.075
GPIO4: A1.26 J3.2 | length 27.8
  Top Layer w0.25: J3.2 384.1,179.8 384.45,179.45 v1(385.575,179.45) ; v1(388.6,179.65) 388.95,180 399.55,180 400.15,179.4 v1(404.975,179.4)
  Bottom Layer w0.25: v1(385.575,179.45) 385.775,179.65 v1(388.6,179.65) ; A1.26 404.065,177.04 404.975,177.95 v1(404.975,179.4)
GPIO15: A1.23 J3.1 | length 25.5
  Top Layer w0.25: J3.1 383.475,178.8 383.725,178.55 v1(384.525,178.55) ; v1(388.8,178.525) 389.35,178.525 391.8,176.075 391.8,172.875 392.75,171.925 392.858,172.033 392.966,171.925 v1(396.4,171.925)
  Bottom Layer w0.25: v1@384.5,178.575 v1(384.525,178.55) 384.625,178.65 384.75,178.525 v1(388.8,178.525) ; v1(396.4,171.925) 397.705,173.23 A1.23
GYRO_INT: A1.9 U3.13 | length 43.6
  Top Layer w0.25: v1(386.975,194.225) 388.2,195.45 U3.13 ; v1(389.15,187.95) 391.3,185.8 399.8,185.8 403.925,181.675 417.575,181.675 v1@418.05,182.15
  Bottom Layer w0.25: v1(386.975,194.225) 388.725,192.475 388.725,188.375 v1(389.15,187.95) ; v1@418.05,182.15 v1(418.125,182.15) 419.895,182.15 A1.9
HMC_INT: A1.7 U5.15 | length 23.7
  Top Layer w0.25: U5.15 412.375,187.1 410.55,185.275 407.125,185.275 406.525,184.675 406.525,183.925 407.125,183.325 414.975,183.325 416.35,184.7 v1(418.45,184.7) v1@418.5,184.75
  Bottom Layer w0.25: v1(418.45,184.7) 419.885,184.7 A1.7
IRQ: A1.6 U1.22 | length 44.6
  Top Layer w0.25: v1(390.1,179.125) 390.575,178.65 416.525,178.65 v1(417.1,179.225)
  Bottom Layer w0.25: U1.22@386.2,185.725 386.2,183.075 390.1,179.175 v1(390.1,179.125) ; v1(417.1,179.225) 417.1,184.875 418.155,185.93 A1.6
MISO_IMU: R13.2 U3.10 U3.15 | length 31.6
  Top Layer w0.25: U3.10 388.675,193.95 387.775,193.05 387.775,190.725 386.925,189.875 383.075,189.875 382.325,190.625 382.325,197.35 382.875,197.9 387.125,197.9 388.575,196.45 U3.15 389.4,196.515 389.4,198 391.1,199.7 R13.2@393.833,199.7
MISO_UWB: A1.31 U1.19 | length 17.1
  Top Layer w0.25: v1(390.525,181.675) 390.6,181.675 391.2,181.075 399.075,181.075 399.425,181.425 v1(399.45,181.425)
  Bottom Layer w0.25: U1.19@390.4,185.725 390.4,181.8 v1(390.525,181.675) ; v1(399.45,181.425) 401.415,183.39 A1.31
MOSI_IMU: R14.2 U3.9 | length 13.6
  Top Layer w0.25: U3.9 389.335,193.035 388.375,192.075 388.375,187 391.375,184 R14.2@393.85,184
MOSI_UWB: A1.37 U1.18 | length 20.8
  Top Layer w0.25: v1(391.8,182.5) 391.8,182 392.225,181.575 396.25,181.575 v1(397.625,182.95)
  Bottom Layer w0.25: v1(391.8,182.5) U1.18@391.8,185.725 ; v1(397.625,182.95) 397.734,182.95 399.775,184.991 399.775,187 400.7,187.925 400.7,190.15 401.56,191.01 A1.37
NetA1_2: A1.2 C14.2 R10.1 | length 9.5
  Bottom Layer w0.25: C14.2@422.648,191.01 C14.2
  Bottom Layer w0.8: A1.2 C14.2@422.648,191.01 ; R10.1 C14.2@422.675,191.008
NetA1_13: A1.13 R15.1 | length 32
  Top Layer w0.25: R15.1 397.85,188.025 v1(397.9,188.075) ; v1@397.788,184.412 398.013,184.412 402.35,180.075 v1(415.95,180.075)
  Bottom Layer w0.25: v1(397.85,184.475) 397.85,188.025 v1(397.9,188.075) ; v1(415.95,180.075) 415.95,177.975 416.885,177.04 A1.13
NetA1_14: A1.14 R13.1 | length 56.7
  Top Layer w0.25: R13.1@395.997,199.7 399.65,199.7 401.475,201.525 420.975,201.525 424.575,197.925 424.575,177.6 422.775,175.8 422.75,175.825 422.625,175.7 v1(421.6,175.7)
  Bottom Layer w0.25: A1.14 419.98,175.825 420.105,175.7 v1(421.6,175.7)
NetA1_16: A1.16 R14.1 | length 32.6
  Top Layer w0.25: R14.1 396.05,184.072 v1(396.05,182.5) ; v1(396.1,177.9) 396.1,177.925 414.325,177.925 v1(417.1,175.15)
  Bottom Layer w0.25: v1(396.05,182.5) 396.05,178 396.025,177.975 v1(396.1,177.9) ; v1(417.1,175.15) 417.1,174.275 418.145,173.23 A1.16
NetA1_24: A1.24 R12.2 | length 3.1
  Bottom Layer w0.25: R12.2 399.208,174.5 A1.24
NetBOOT1_2: BOOT1.2 C10.1 R7.2 | length 8.5
  Top Layer w0.25: BOOT1.2 400.6,161.65 401.634,160.616 C10.1 404.575,157.691 R7.2
NetC9_2: C9.2 U4.8 Y1.2 | length 14.6
  Top Layer w0.25: Y1.2 397.358,175.975 C9.2
  Bottom Layer w0.25: U4.8 385.68,172.58 387.225,174.125 v1(389.275,174.125) 390.225,173.175 392.039,173.175 v1(393.314,174.45)
NetC11_1: C11.1 U4.7 Y1.1 | length 15.4
  Top Layer w0.25: v1@387.025,168.25 387.8,167.475 Y1.1 C11.1@399.2,167.475
  Bottom Layer w0.25: U4.7@386.975,171.1 386.975,168.3 v1@387.025,168.25
  other v1: 387.025,168.325
NetC12_1: C12.1 U4.4 | length 15.7
  Bottom Layer w0.25: U4.4@390.8,171.1 390.8,165.425 391.775,164.45 C12.1
NetC17_1: C17.1 U5.10 | length 2.8
  Top Layer w0.25: C17.1@407.85,190.675 U5.10
NetC20_1: C20.1 U5.12 | length 8.4
  Top Layer w0.25: C20.1@405.175,188.3 405.175,187.525 405.6,187.1 409.65,187.1 410.625,188.075 U5.12
NetC20_2: C20.2 U5.8 | length 7.3
  Top Layer w0.25: C20.2@405.125,190.575 405.175,190.625 405.175,191.425 405.675,191.925 U5.8
NetD1_1: D1.1 R1.2 | length 2.4
  Top Layer w0.25: R1.2@382.686,158.458 R1.2@382.869,158.275 ; R1.2@382.761,158.783 D1.1
NetD2_1: D2.1 R6.1 | length 5.7
  Bottom Layer w0.25: R6.1 395.957,166.357 396.575,166.975 396.575,167.925 397.675,169.025 D2.1
NetD3_1: D3.1 R9.1 | length 7.4
  Bottom Layer w0.25: R9.1 392.775,165.6 393.45,164.925 396.6,164.925 397.6,165.925 D3.1 D3.1@397.6,167.014
NetJ1_4: J1.4 J1.9
NetR2_1: R2.1 R3.1 U2.5 | length 6.2
  Top Layer w0.25: R3.1 R2.1 402.7,173.783 402.7,171.7 403.1,171.3 U2.5
NetR4_2: R4.2 R5.2 U3.7 | length 5.1
  Top Layer w0.25: U3.7 391.665,192.86 391.925,192.6 R5.2@393.75,192.6 ; R4.2@393.75,190.35 R5.2@393.75,192.6 ; R5.2 R5.2@393.75,192.6
NetU3_12: U3.12 U3.16 | length 2.8
  Top Layer w0.25: U3.12 389.975,194.95 390.5,195.475 U3.16
RESET: A1.12 U1.3 | length 65.2
  Top Layer w0.25: v1(421.65,178.275) 423.3,178.275 v1(423.75,178.725)
  Bottom Layer w0.25: U1.3 386.225,200.175 387.85,201.8 419.9,201.8 424.3,197.4 424.3,179.275 v1(423.75,178.725) ; A1.12 419.96,178.275 v1(421.65,178.275)
RX_ESP: A1.34 J5.2 R6.2 U4.2 | length 42.1
  Top Layer w0.25: J5.2 388.725,172.15 390.7,170.175 v1(396.925,170.175)
  Bottom Layer w0.25: v1(396.925,170.175) 396.925,169.425 396.042,168.542 R6.2 394.858,168.542 393.3,170.1 U4.2 393.3,172.3 394.15,173.15 395.1,173.15 397.525,175.575 397.525,180.6 400.95,184.025 400.95,186.5 401.375,186.925 A1.34@401.925,186.925
SCK_IMU: R15.2 U3.8 | length 7
  Top Layer w0.25: U3.8 390.5,190.275 392.75,188.025 R15.2
SCK_UWB: A1.30 U1.20 | length 18.9
  Top Layer w0.25: v1(389.25,182.525) 389.25,181.125 389.825,180.55 v1(400.125,180.55)
  Bottom Layer w0.25: U1.20@389,185.725 389.175,185.55 v1@389.175,182.525 ; v1(400.125,180.55) 400.125,181.05 401.195,182.12 A1.30
Sensor_VN: A1.5 J2.2 | length 23.8
  Top Layer w0.25: v1(417.725,187.2) 419.9,185.025 419.9,172.2 420.975,171.125 J2.2
  Bottom Layer w0.25: v1(417.725,187.2) A1.5
Sensor_VP: A1.4 J2.1 | length 22
  Top Layer w0.25: v1(421.745,188.47) 421.745,185.495 420.7,184.45 420.7,175.3 421.475,174.525 424.075,174.525 425.188,173.413 J2.1@425.188,172.112
  Bottom Layer w0.25: A1.4 v1(421.745,188.47)
TX_ESP: A1.35 J5.3 R9.2 U4.3 | length 35.8
  Top Layer w0.25: J5.3 v1(388.45,173.15)
  Bottom Layer w0.25: v1(388.45,173.15) 389.025,172.575 391.685,172.575 392.03,172.23 ; R9.2 392.03,169.337 U4.3 392.03,172.23 ; A1.35 401.42,188.47 401.15,188.2 401.15,187.525 400.325,186.7 400.325,184.425 396.925,181.025 396.925,175.925 394.675,173.675 393.475,173.675 392.03,172.23
pads on no net: A1.17 A1.18 A1.19 A1.20 A1.21 A1.22 A1.27 A1.28 A1.32 J2.3 U1.1 U1.2 U1.4 U1.9 U1.10 U1.11 U1.12 U1.13 U1.14 U1.15 U4.9 U4.10 U4.11 U4.12 U4.14 U4.15 U5.3 U5.5 U5.6 U5.7 U5.14

## Polygon pours and split planes (outlines as drawn)
GND on Top Layer "Top Layer-No Net" (solid, remove dead copper, pour order 24): 426.175,203.3 426.175,153.675 426.15,153.7 381.15,153.7 381.15,203.275 381.175,203.3
GND on Bottom Layer "Top Layer-No Net" (solid, remove dead copper, pour order 26): 381.05,203.425 426.275,203.425 426.275,153.625 381.05,153.625

## Other copper
Bottom Layer:
  pour cut-out: 448.4,226.725 470.875,226.725

## Silkscreen, mask and mechanical layers (free items; w line width, h text height)
Mechanical 13:
  lines w0.25: 381.132,153.7 426.225,153.7 426.225,203.325 381.132,203.325 381.132,187.597 381.132,153.7